# EAGLE board ArduinoTemp (EAGLE 9.7.0)

Size 145.8 x 68.84 mm. Coordinates in mm from the lower left corner, seen from the top.
Outline: 0,0 145.8,0 145.8,68.84 0,68.84 0,0
Copper layers (1*16): Top 0.035mm / dielectric 1.5mm / Bottom 0.035mm
Design rules "default": minimum track width 6mil, minimum drill 0.35mm, track to track 6mil, track to pad 6mil, pad to pad 6mil, via to via 6mil, smd to smd 6mil, copper to edge 40mil, drill to drill 6mil, minimum pad ring 10mil, minimum via ring 8mil, stop-mask expansion 4mil, vias tented up to drill 0mil, thermal gap 10mil

## Footprints (pad centres in the part's own frame; a part is rotated, then mirrored left to right if it is on the bottom)
7SEG-13 = drill 0.813 long: 1 -5.08,-7.62; 2 -2.54,-7.62; 3 0,-7.62; 4 2.54,-7.62; 5 5.08,-7.62; 6 5.08,7.62; 7 2.54,7.62; 8 0,7.62; 9 -2.54,7.62; 10 -5.08,7.62
RESAD1016W63L850D250B = drill 0.83 pad 1.43: 1 -5.08,0; 2 5.08,0
SG90 = drill 1.016 long: 1 -2.54,0; 2 0,0; 3 2.54,0
ARDUINO-UNO-R3-SHIELD = drill 1.016 pad 1.88: 3.3V 24.13,-2.54; 5V 24.13,0; A0 24.13,12.7; A1 24.13,15.24; A2 24.13,17.78; A3 24.13,20.32; A4 24.13,22.86; A5 24.13,25.4; AREF -24.13,-13.97; D2 -24.13,20.32; D3 -24.13,17.78; D4 -24.13,15.24; D5 -24.13,12.7; D6 -24.13,10.16; D7 -24.13,7.62; D8 -24.13,3.81; D9 -24.13,1.27; D10 -24.13,-1.27; D11 -24.13,-3.81; D12 -24.13,-6.35; D13 -24.13,-8.89; GND@0 24.13,2.54; GND@1 24.13,5.08; GND@2 -24.13,-11.43; IOREF 24.13,-7.62; NC 24.13,-10.16; RES 24.13,-5.08; RX -24.13,25.4; SCL -24.13,-19.05; SDA -24.13,-16.51; TX -24.13,22.86; VIN 24.13,7.62
TO92 = drill 0.813 octagon: 1 -1.27,0; 2 0,1.905; 3 1.27,0

## Placement (x,y rotation side)
DIGIT1  7SEG-CK  [7SEG-13]  126.67,19.03 0 top
R1  0.33k  [RESAD1016W63L850D250B]  116.51,29.19 180 top
R2  0.33k  [RESAD1016W63L850D250B]  119.05,31.73 180 top
R3  0.33k  [RESAD1016W63L850D250B]  136.83,8.87 0 top
R4  0.33k  [RESAD1016W63L850D250B]  136.83,29.19 0 top
R5  0.33k  [RESAD1016W63L850D250B]  134.29,31.73 0 top
R6  0.33k  [RESAD1016W63L850D250B]  116.51,8.87 180 top
R7  0.33k  [RESAD1016W63L850D250B]  119.05,6.33 180 top
R9  0.33k  [RESAD1016W63L850D250B]  134.29,6.33 0 top
SERVO1  SERVOSG90  [SG90]  133.88,61.86 90 top
U1  ARDUINO-UNO-R3-SHIELD  [ARDUINO-UNO-R3-SHIELD]  47.88,38.36 270 top
U2  TMP36GT9Z_TO92  [TO92]  106.35,24.11 0 top

## Library data of the parts
DIGIT1 = Tinkercad; CATEGORY: Opto-Electronic; SUB-CATEGORY: Display; TYPE: 7-Segment
R1-R7 R9 SERVO1 U1 U2 = Tinkercad

## Nets
DIGIT1_A: DIGIT1.7 R5.1
DIGIT1_B: DIGIT1.6 R4.1
DIGIT1_C: DIGIT1.4 R9.1
DIGIT1_D: DIGIT1.2 R7.1
DIGIT1_DP: DIGIT1.5 R3.1
DIGIT1_E: DIGIT1.1 R6.1
DIGIT1_F: DIGIT1.9 R2.1
DIGIT1_G: DIGIT1.10 R1.1
U1_5V: SERVO1.2 U1.5V U2.3
U1_A0: U1.A0 U2.2
U1_D2: R5.2 U1.D2
U1_D3: R4.2 U1.D3
U1_D4: R9.2 U1.D4
U1_D5: R7.2 U1.D5
U1_D6: R6.2 U1.D6
U1_D7: R2.2 U1.D7
U1_D8: R1.2 U1.D8
U1_D9: SERVO1.3 U1.D9
U1_D10: R3.2 U1.D10
U1_GND: DIGIT1.8 SERVO1.1 U1.GND@0 U1.GND@1 U1.GND@2 U2.1

## Tracks (layer width: path | path; a pad name or v marks a point on that pad's centre or on a via)
DIGIT1_A  (1 unrouted)
DIGIT1_B  (1 unrouted)
DIGIT1_C  (1 unrouted)
DIGIT1_D  (1 unrouted)
DIGIT1_DP  (1 unrouted)
DIGIT1_E  (1 unrouted)
DIGIT1_F  (1 unrouted)
DIGIT1_G  (1 unrouted)
U1_5V  (2 unrouted)
U1_A0  (1 unrouted)
U1_D2  (1 unrouted)
U1_D3  (1 unrouted)
U1_D4  (1 unrouted)
U1_D5  (1 unrouted)
U1_D6  (1 unrouted)
U1_D7  (1 unrouted)
U1_D8  (1 unrouted)
U1_D9  (1 unrouted)
U1_D10  (1 unrouted)
U1_GND  (5 unrouted)